# EAGLE board PCB_CoLAB_Board (EAGLE 9.6.2)
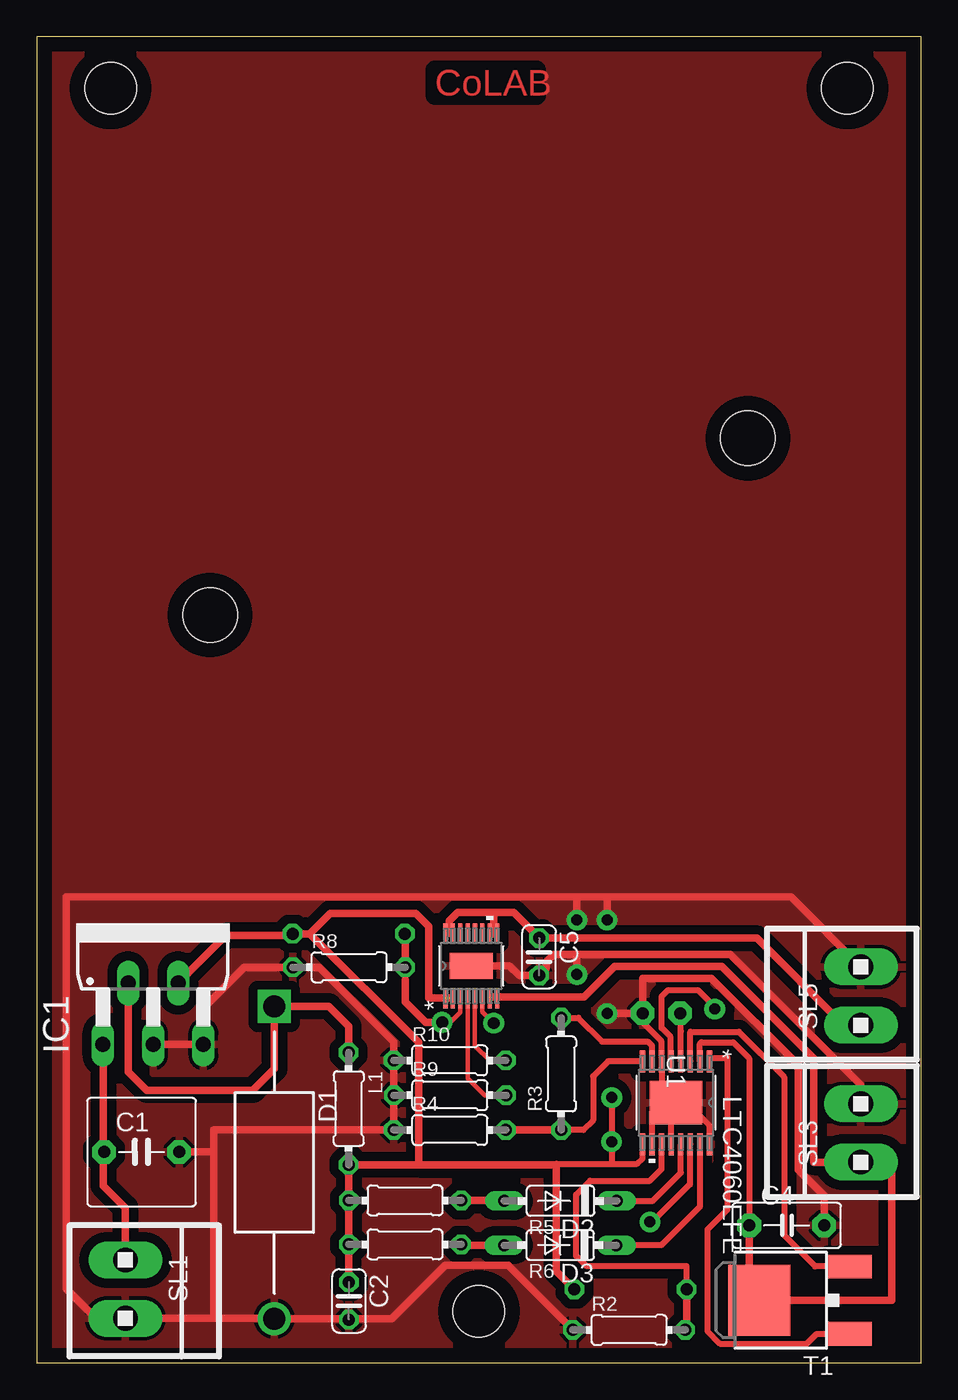
[diagram p0: board, top side]
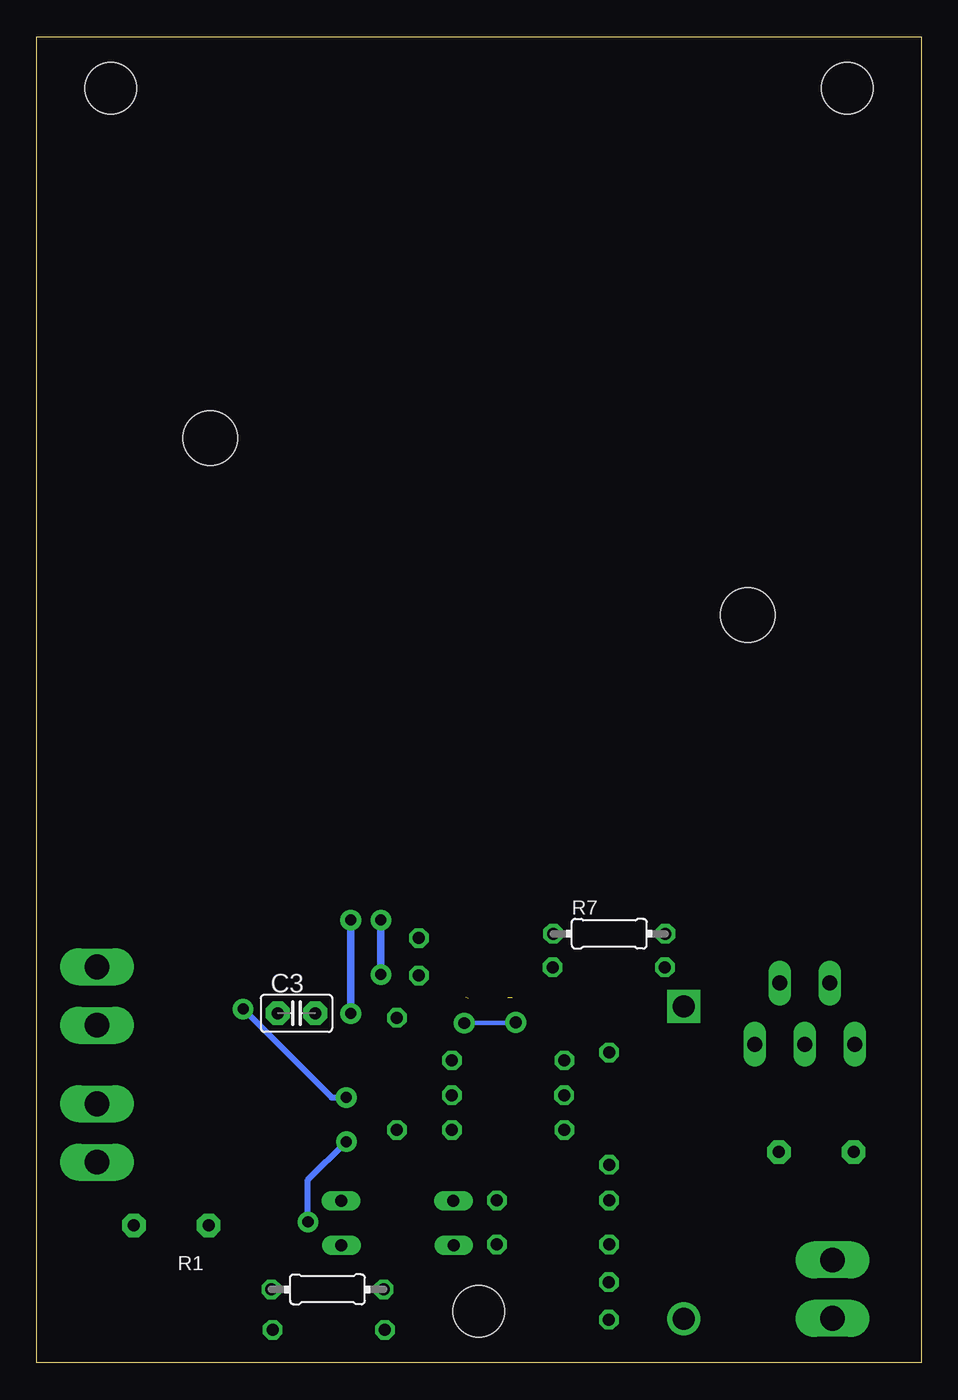
[diagram p1: board, bottom side, seen from below]

Size 60 x 90 mm. Coordinates in mm from the lower left corner, seen from the top.
Outline: 60,0 60,90 0,90 0,0 60,0
Copper layers (1*16): Top 0.035mm / dielectric 1.5mm / Bottom 0.035mm
Design rules "default": minimum track width 6mil, minimum drill 0.35mm, track to track 6mil, track to pad 6mil, pad to pad 6mil, via to via 6mil, smd to smd 6mil, copper to edge 40mil, drill to drill 6mil, minimum pad ring 10mil, minimum via ring 8mil, stop-mask expansion 4mil, vias tented up to drill 0mil, thermal gap 10mil
Net classes: 0 default: clearance 0.205 mm
Holes 3.5 mm at 30,3.5 5,86.5 55,86.5
Holes 3.7 mm at 48.25,62.75 11.75,50.75

## Footprints (pad centres in the part's own frame; a part is rotated, then mirrored left to right if it is on the bottom)
C5B7.2 = drill 0.813 pad 1.6 octagon: 1 -2.54,0; 2 2.54,0
C025-024X044 = drill 0.813 octagon: 1 -1.27,0; 2 1.27,0
C2.5-2 = drill 0.813 pad 1.6 octagon: 1 -1.27,0; 2 1.27,0
C5B3 = drill 0.813 pad 1.6 octagon: 1 -2.54,0; 2 2.54,0
DIOAD2120W130L950D530P = drill 1.5 pad 2.25: A 10.6,0 | drill 1.5 pad 2.25 square: C -10.6,0
DO35-7 = drill 0.813 long: A 3.81,0; C -3.81,0
T05D = drill 1.016 long: 1 -3.404,-5.08; 2 -1.702,-0.914; 3 0,-5.08; 4 1.702,-0.914; 5 3.404,-5.08
0204/7 = drill 0.813 octagon: 1 -3.81,0; 2 3.81,0
1X2MTA = drill 1.676 long: 1 1.981,0; 2 -1.981,0
DPAK = smd 1.6 x 3: 1 -2.28,-4.04; 3 2.28,-4.04 | smd 4.826 x 4.191: 4 0,2.096
TSSOP-16_FE/BC_LIT = smd 1.473 x 0.356: 1 -2.819,2.276; 2 -2.819,1.626; 3 -2.819,0.975; 4 -2.819,0.325; 5 -2.819,-0.325; 6 -2.819,-0.975; 7 -2.819,-1.626; 8 -2.819,-2.276; 9 2.819,-2.276; 10 2.819,-1.626; 11 2.819,-0.975; 12 2.819,-0.325; 13 2.819,0.325; 14 2.819,0.975; 15 2.819,1.626; 16 2.819,2.276 | smd 2.946 x 3.581: EPAD 0,0
MSOP-16_MSE = smd 1.397 x 0.279: 1 -2.184,1.751; 2 -2.184,1.251; 3 -2.184,0.751; 4 -2.184,0.25; 5 -2.184,-0.25; 6 -2.184,-0.751; 7 -2.184,-1.251; 8 -2.184,-1.751; 9 2.184,-1.751; 10 2.184,-1.251; 11 2.184,-0.751; 12 2.184,-0.25; 13 2.184,0.25; 14 2.184,0.751; 15 2.184,1.251; 16 2.184,1.751 | smd 1.753 x 2.946: 17 0,0

## Placement (x,y rotation side)
C1  [C5B7.2]  7.11,14.3 0 top
C2  [C025-024X044]  21.18,4.19 270 top
C3  [C2.5-2]  42.38,23.72 0 bottom
C4  [C5B3]  50.88,9.32 0 top
C5  [C025-024X044]  34.08,27.55 270 top
D1  1N5822  [DIOAD2120W130L950D530P]  16.11,13.59 270 top
D2  1N4148DO35-7  [DO35-7]  35.54,10.98 180 top
D3  1N4148DO35-7  [DO35-7]  35.52,7.98 180 top
IC1  LM2596T  [T05D]  7.89,26.69 0 top
L1  [0204/7]  21.16,17.25 270 top
R1  [0204/7]  40.28,4.98 0 bottom
R2  [0204/7]  40.19,2.22 0 top
R3  [0204/7]  35.57,19.6 90 top
R4  [0204/7]  28.02,15.8 0 top
R5  [0204/7]  24.98,11.01 180 top
R6  [0204/7]  24.98,8.03 180 top
R7  [0204/7]  21.16,29.12 0 bottom
R8  [0204/7]  21.19,26.84 0 top
R9  [0204/7]  28.03,18.16 0 top
R10  [0204/7]  28.02,20.52 0 top
SL1  [1X2MTA]  6.01,4.99 270 top
SL3  [1X2MTA]  55.91,15.59 90 top
SL5  [1X2MTA]  55.91,24.89 90 top
T1  MJD32  [DPAK]  51.12,4.24 90 top
U1  LTC4060EFE  [TSSOP-16_FE/BC_LIT]  43.37,17.64 270 top
U2  LTC4415EMSEPBF  [MSOP-16_MSE]  29.48,26.93 90 top

## Library data of the parts
C1 C3 C4 = capacitor-wima
C2 C5 L1 = rcl
D1 = 1N5822; AVAILABILITY: Good; DESCRIPTION: Diode Schottky 40V 3A Through Hole DO-201AD; MF: ON Semiconductor; MP: 1N5822; PACKAGE: AXIAL LEAD-2 ON Semiconductor; PRICE: None; PURCHASE-URL: https://pricing.snapeda.com/search/part/1N5822/?ref=eda
D2 D3 = diode
IC1 = national-semiconductor; MPN: LM2596T-ADJ/LF02; OC_FARNELL: 9494162; OC_NEWARK: 65K5910
R1-R10 = eagle-ltspice; SPICEMODEL: NONE; SPICEPREFIX: R
SL1 SL3 SL5 = con-amp; OC_FARNELL: unknown; OC_NEWARK: unknown
T1 = transistor
U1 = LTC4060; BUILT_BY: EMA_UL_Team; MANUFACTURER_PART_NUMBER: LTC4060EFE; SOURCELIBRARY: LinearTech_2016-05-13_9; VENDOR: Linear Technology
U2 = LTC4415EMSEPBF; AVAILABILITY: Warning; DESCRIPTION: OR Controller Source Selector Switch P-Channel 2:2 16-MSOP-EP; MF: Analog Devices; MP: LTC4415EMSE#PBF; PACKAGE: MSOP -16 Analog Devices; PRICE: None; PURCHASE-URL: https://pricing.snapeda.com/search/part/LTC4415EMSE#PBF/?ref=eda

## Nets
GND: C1.2 C2.2 C3.2 C4.2 C5.2 D1.A IC1.3 IC1.5 R2.1 R4.1 R8.1 R9.1 R10.1 SL1.1 SL3.1 SL5.1 U1.6 U1.10 U1.12 U1.16 U1.EPAD U2.17
N$1: R3.2 U1.7
N$2: C1.1 IC1.1 SL1.2
N$3: D1.C IC1.2 L1.1
N$4: R1.1 R2.2 U1.11
N$5: R7.1 R8.2 U2.3 U2.6
N$6: R3.1 R4.2 U1.8
N$7: T1.3 U1.3
N$8: T1.1 U1.1
N$9: C2.1 IC1.4 L1.2 R1.2 R5.2 R6.2 R7.2 U1.5 U1.9 U1.14 U2.1
N$11: C3.1 U1.4
N$12: D2.A R5.1
N$13: D2.C U1.13
N$14: D3.C U1.15
N$15: D3.A R6.1
N$16: C4.1 SL3.2 T1.4 U1.2 U2.7 U2.8
N$17: R9.2
N$18: R10.2 U2.5
N$19 [New Class]: C5.1 SL5.2 U2.9 U2.10 U2.15 U2.16
S$1: U2.4

## Tracks (layer width: path | path; a pad name or v marks a point on that pad's centre or on a via)
GND  (via drill 0.75 pad 1.4)
  Top 0.406: U1.12 43.05,17.32 U1.EPAD | U1.EPAD 44.11,17.64 45.65,16.1 U1.16 | U1.10 41.74,16.99 42.38,17.64 U1.EPAD | 42,18 42.4,18.39 U1.6 42.4,21.8 41.11,23.09 C3.2
  Top 0.508: 12,3.01 SL1.1 3.99,3.01 2,5 2,31.6 36.65,31.6 | 12,3.01 16.09,3.01 D1.A 21.11,2.99 | C1.2 12,14.3 | 12,14.3 12,15.8 R4.1 | 42,18 43,18 U1.EPAD | R4.1 24,16.01 | IC1.3 IC1.5 11.29,24.06 14.07,26.84 R8.1 19.16,26.84 24.21,21.79 R10.1 R9.1 R4.1 | SL3.1 55.91,18.87 47.05,27.73 36.65,27.73 | C4.2 53.42,11.32 51.65,13.09 51.65,20.2 45.75,26.1 41.11,26.1 C3.2 38.72,23.72 v38.7,23.7 | SL5.1 51.18,31.6 38.7,31.6 | 38.7,31.6 36.65,31.6 | U2.17 32.07,26.93 32.72,26.28 C5.2 34.55,26.75 34.55,27.2 35.08,27.73 36.65,27.73 | 21.11,2.99 C2.2 | 21.11,2.99 24.09,2.99 27.7,6.6 32,6.6 R2.1 | 12,3.01 12,14.3 | v36.65,26.35 36.65,27.73 | v36.65,30.05 36.65,31.6 | v38.7,30.05 38.7,31.6
  Bottom 0.508: v36.65,26.35 v36.65,30.05 | v38.7,23.7 v38.7,30.05
  pour Top (isolate 0.635, rank 2): 0,90 60,90 60,0 0,0
N$1
  Top 0.406: U1.7 41.74,21.51 41.45,21.8 38.35,21.8 36.74,23.41 R3.2
N$2
  Top 0.254: 4.52,21.58 IC1.1
  Top 0.508: C1.1 4.51,14.36 | SL1.2 6.01,10.52 4.51,12.02 4.51,14.36 | IC1.1 4.51,21.59 4.51,14.36
N$3
  Top 0.508: IC1.2 6.2,25.76 6.2,19.75 7.46,18.49 14.66,18.49 16.11,19.94 D1.C 19.81,24.19 21.16,22.84 L1.1
N$4
  Top 0.406: R1.1 44.09,6.55 37.3,6.55 36.6,7.25 36.6,11.4 37.55,12.35 41.6,12.35 42.4,13.14 U1.11
  Top 0.508: R1.1 44.09,2.31 R2.2
N$5  (via drill 0.8 pad 1.4)
  Top 0.152: 25,27 R8.2
  Top 0.305: 30.24,24.73 U2.6 30.23,23.82 v31,23.05 | U2.3 28.73,23.78 28.05,23.1 v27.5,23.1
  Top 0.406: R8.2 25,26
  Top 0.508: 25,27 25,29.09 R7.1 | 25,26 25,24.5 26.4,23.1 v27.5,23.1
  Bottom 0.305: v31,23.05 27.55,23.05 v27.5,23.1
N$6
  Top 0.406: U1.8 38.76,20.46 37.75,19.45 37.75,16.45 37.09,15.79 R3.1
  Top 0.508: 31.82,15.81 R4.2 R3.1
N$7
  Top 0.406: T1.3 55.14,6.54 52.81,6.54 50.7,8.65 50.7,19.4 47.64,22.46 44.34,22.46 U1.3
N$8
  Top 0.406: U1.1 45.65,20.7 46.85,20.7 46.85,10.38 45.5,9.04 45.5,2.15 46.35,1.3 52.25,1.3 52.91,1.96 T1.1
N$9  (via drill 0.75 pad 1.4)  (1 unrouted)
  Top 0.406: 35.25,13.44 35.25,13.5 39,13.5 | U1.9 41.1,13.85 40.75,13.5 39,13.5 | U1.14 44.31,14.78 44.31,12.09 41.77,9.55 v41.6,9.55 | 39,13.5 v39,15 v39,17.99 v39.01,18 | U1.5 43.01,20.5 43.01,22.11 42.4,22.71 42.4,24.85 42.85,25.3 44.85,25.3 46,24.15 v46,24
  Top 0.508: R5.2 21.12,11.06 | R5.2 R6.2 C2.1 | R1.2 35.25,6.2 35.25,13.44 25.9,13.44 | R5.2 L1.2 25.9,13.44 | 18.53,29.12 25.9,21.75 25.9,13.44 | IC1.4 12.82,29 17.23,29 R7.2 18.53,29.12 | 28.03,24.75 26.6,24.75 26.6,29.6 25.7,30.5 19.91,30.5 18.53,29.12
  Bottom 0.406: v41.6,9.55 41.6,12.4 v39,15 | v46,24 40,18 v39.01,18
N$11
  Top 0.406: U1.4 43.7,22.5 | 43.7,22.5 | 43.7,22.5 43.7,23.5 43.65,23.55 C3.1
N$12
  Top 0.508: D2.A 31.7,11.01 R5.1
N$13
  Top 0.406: D2.C 41.78,10.98 43.7,12.89 U1.13
N$14
  Top 0.406: U1.15 45,10.6 42.38,7.98 D3.C
N$15
  Top 0.508: D3.A 28.84,7.98 R6.1
N$16  (1 unrouted)
  Top 0.406: U1.2 45,21.65 45.1,21.75 47.25,21.75 48.34,20.66 C4.1
  Top 0.508: C4.1 48.34,4.92 T1.4 58,4.24 58,13.05 57.44,13.61 SL3.2 52.71,13.61 52.71,20.66 46.47,26.9 39.2,26.9 37.15,24.85 31.13,24.85 | U2.8 31.13,24.85 | 31.13,24.85 30.88,24.85
N$17
  Top 0.305: R9.2 30.39,18.16 29.24,19.31
N$18
  Top 0.305: R10.2 30.73,20.52 29.73,21.52 U2.5
N$19
  Top 0.305: U2.10 31,29.11 U2.9 | U2.15 28.13,29.11 U2.16
  Top 0.508: SL5.2 54.76,22.91 48.85,28.82 C5.1 32.35,30.55 31,30.55 | 28.13,29.11 28,29.24 28,30 28.55,30.55 31,30.55 | 31,30.55 31,29.11
S$1
  Top 0.305: U2.4 29.23,19.32 29.25,19.3

## Text on the board
Top: CoLAB